# Altium PCB pwr_brd.PcbDoc
Units mil, origin at the board's own origin, x right, y up, seen from the top; angles counter-clockwise.
Board outline 6000 x 4000 mil, 2 copper layers (Top Layer, Bottom Layer); 3 components, 3 nets, 11 pads, 0 vias.
Unrouted connection lines stored in the file: 4.
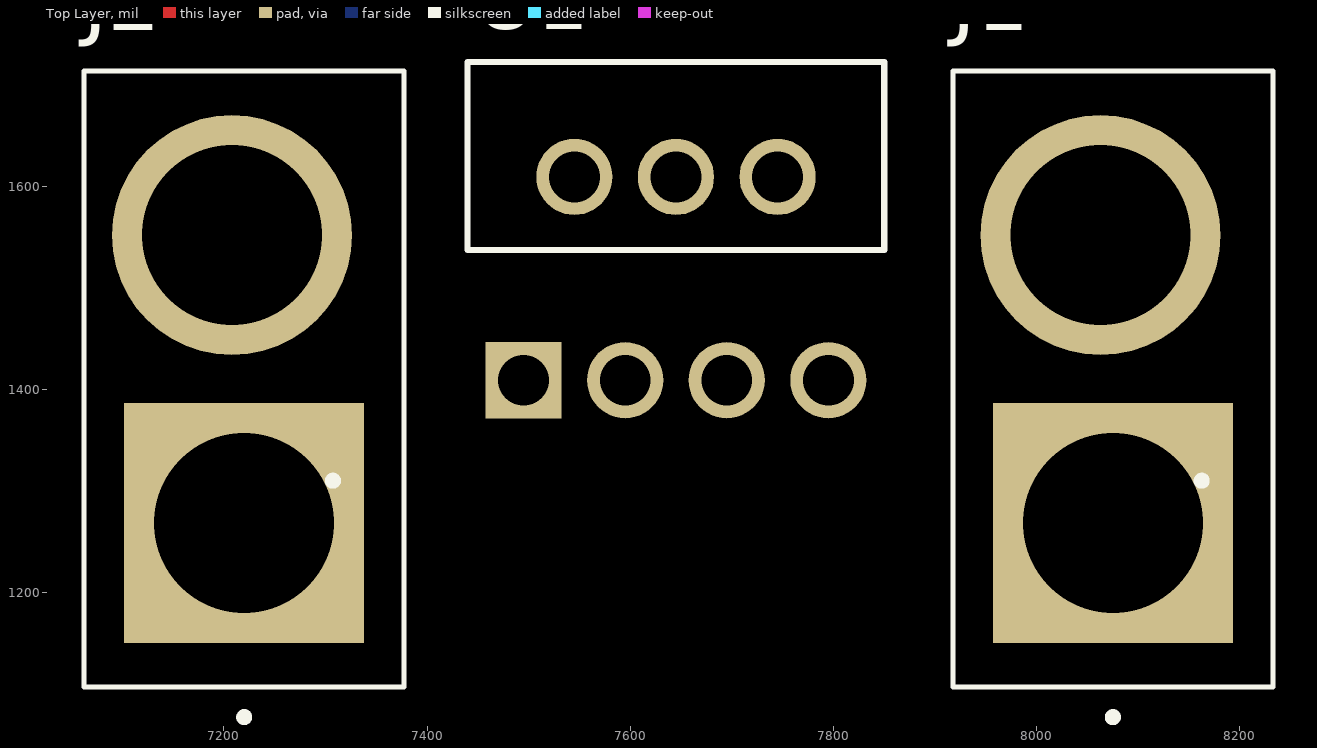
[diagram p0: Top Layer view]
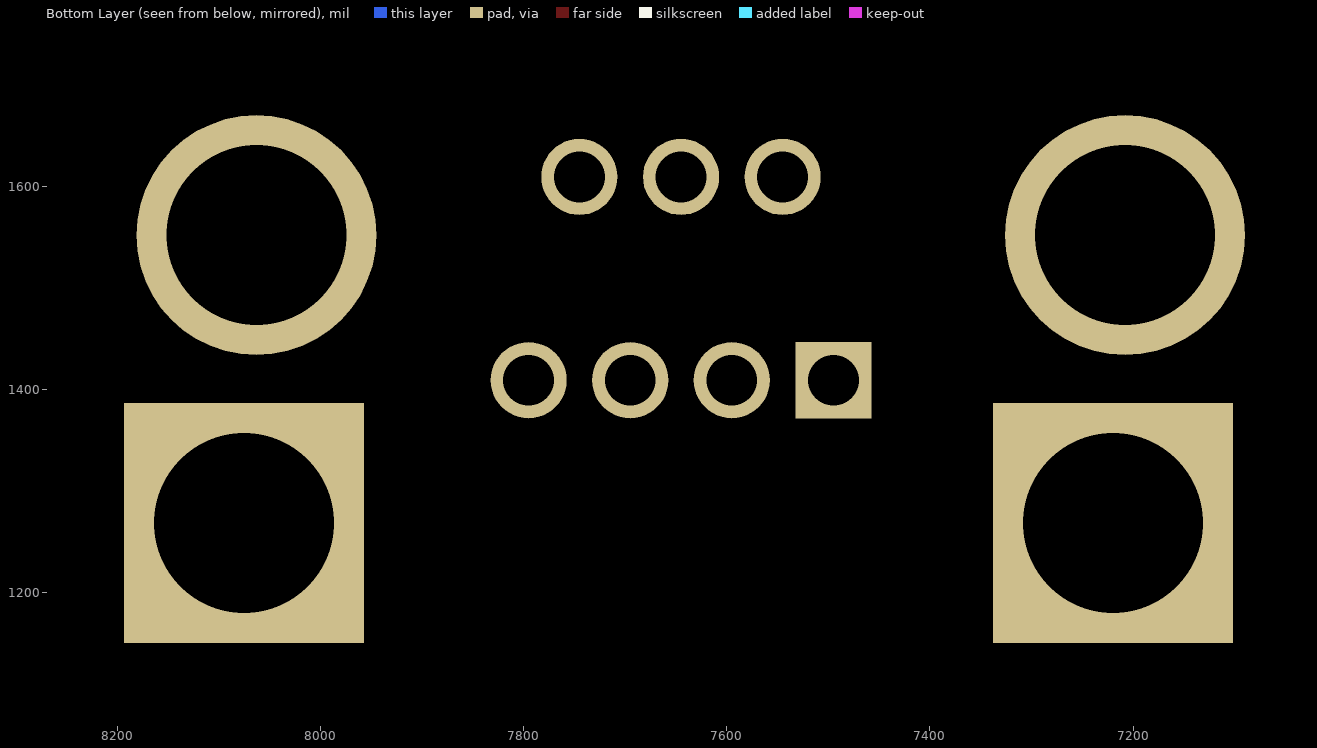
[diagram p1: Bottom Layer view, seen from below]

## Layer stack, top to bottom
Top Solder: solder mask 0.4, Solder Resist, Dk 3.5
Top Layer: signal copper 1.4
Dielectric 1: dielectric 12.6, FR-4, Dk 4.8
Bottom Layer: signal copper 1.4
Bottom Solder: solder mask 0.4, Solder Resist, Dk 3.5

## Board outline
1000,1000 7000,1000 7000,5000 1000,5000

## Design rules (kind name [scope] priority, off if disabled: settings)
Clearance [All] p1: gap=10 ignorepadtopadclearanceinfootprint=FALSE except(0: Arc-Hole Track-Hole SMDPad-Hole THPad-Hole Via-Hole Fill-Hole Poly-Hole Region-Hole Text-Hole)
PolygonConnect [All] p1: connectstyle=Relief reliefconductorwidth=10 reliefentries=4 polygonreliefangle="90 Angle" airgapwidth=10
RoomDefinition pwr_brd [InComponentClass('pwr_brd')] p1: confinementstyle=ConfineIn formatcopy=TRUE lockcomponents=FALSE outline 0,0 2000,0 2000,1000 0,1000
RoutingVias [All] p1: holewidth=28 width=50 viastyle="Through Hole" minholewidth=28 minwidth=50 maxholewidth=28 maxwidth=50
SolderMaskExpansion [All] p1: expansion=4 istentingtop=FALSE
Width [All] p1: maxlimit=10 minlimit=10 preferedwidth=10
30 further rules are at their usual default settings.

## Components (designator, comment, footprint, x,y, rotation, side; value= is the part's Value field where it differs from the comment)
J1 "XT60_YELLOW" AMASS_XT60PB-M 8075,1410 r90 top
J2 "XT60_YELLOW" AMASS_XT60PB-M 7220,1410 r90 top
U1 "LM2590HVT-ADJ" TO127P470X1016X1740-7P 7795,1850 r0 top

## Footprints (in the part's own frame and the unit in brackets; to place one, negate y for a bottom-side part, rotate by r counter-clockwise, add the part's x,y. Pads: shape width x height; smd on the part's side, far side on the other; paste and mask are expansions set on the pad)
AMASS_XT60PB-M [mm]
  rect 6x6 hole 4.5: 1(-3.6,0)
  round 6 hole 4.5: 2(3.6,0.305)
  silkscreen extent -8.55,-4 7.7,4
TO127P470X1016X1740-7P [mil]
  rect 75x75 hole 50: 1(-300,-441)
  round 75 hole 50: 2(-250,-241) 3(-200,-441) 4(-150,-241) 5(-100,-441) 6(-50,-241) 7(0,-441)
  silkscreen extent -355,-313 55,-128

## Part data
J1 J2: "Power connector; 65A; PIN: 2; Colour: yellow", Package=None, Availability=Unavailable, MF=Pololu, MP="XT60 YELLOW", Price=None, SnapEDA_Link=https://www.snapeda.com/parts/XT60%20YELLOW/Pololu/view-part/423230/?ref=snap
U1: "IC BUCK ADJ 1A", Package=None, Supplier Part Number 1=LM2590HVT-ADJ/NOPB-ND, Availability=Unavailable, MP=LM2590HVT-ADJ, Price=None, Supplier 1=Digi-Key

## Nets (pads, with @x,y where several pads share a name; then routed paths per layer and width w, separated by ;. In a path a pad name is that pad's centre, name@x,y a point inside that pad or via, vN(x,y) a via of type N, cw(c..) or ccw(c..) an arc to the next point about the centre after c; other vN are vias at no path point)
"+12 VDC": U1.2
"+48 VDC": J1.1 J2.1 U1.1
GND: J1.2 J2.2 U1.4
pads on no net: U1.3 U1.5 U1.6 U1.7